# Altium PCB 核心板.pcbdoc (part 1 of 2)
Units mil, origin at the board's own origin, x right, y up, seen from the top; angles counter-clockwise.
Board outline 5980 x 3735 mil, 2 copper layers (Top Layer, Bottom Layer); 54 components, 185 nets, 550 pads, 371 vias.
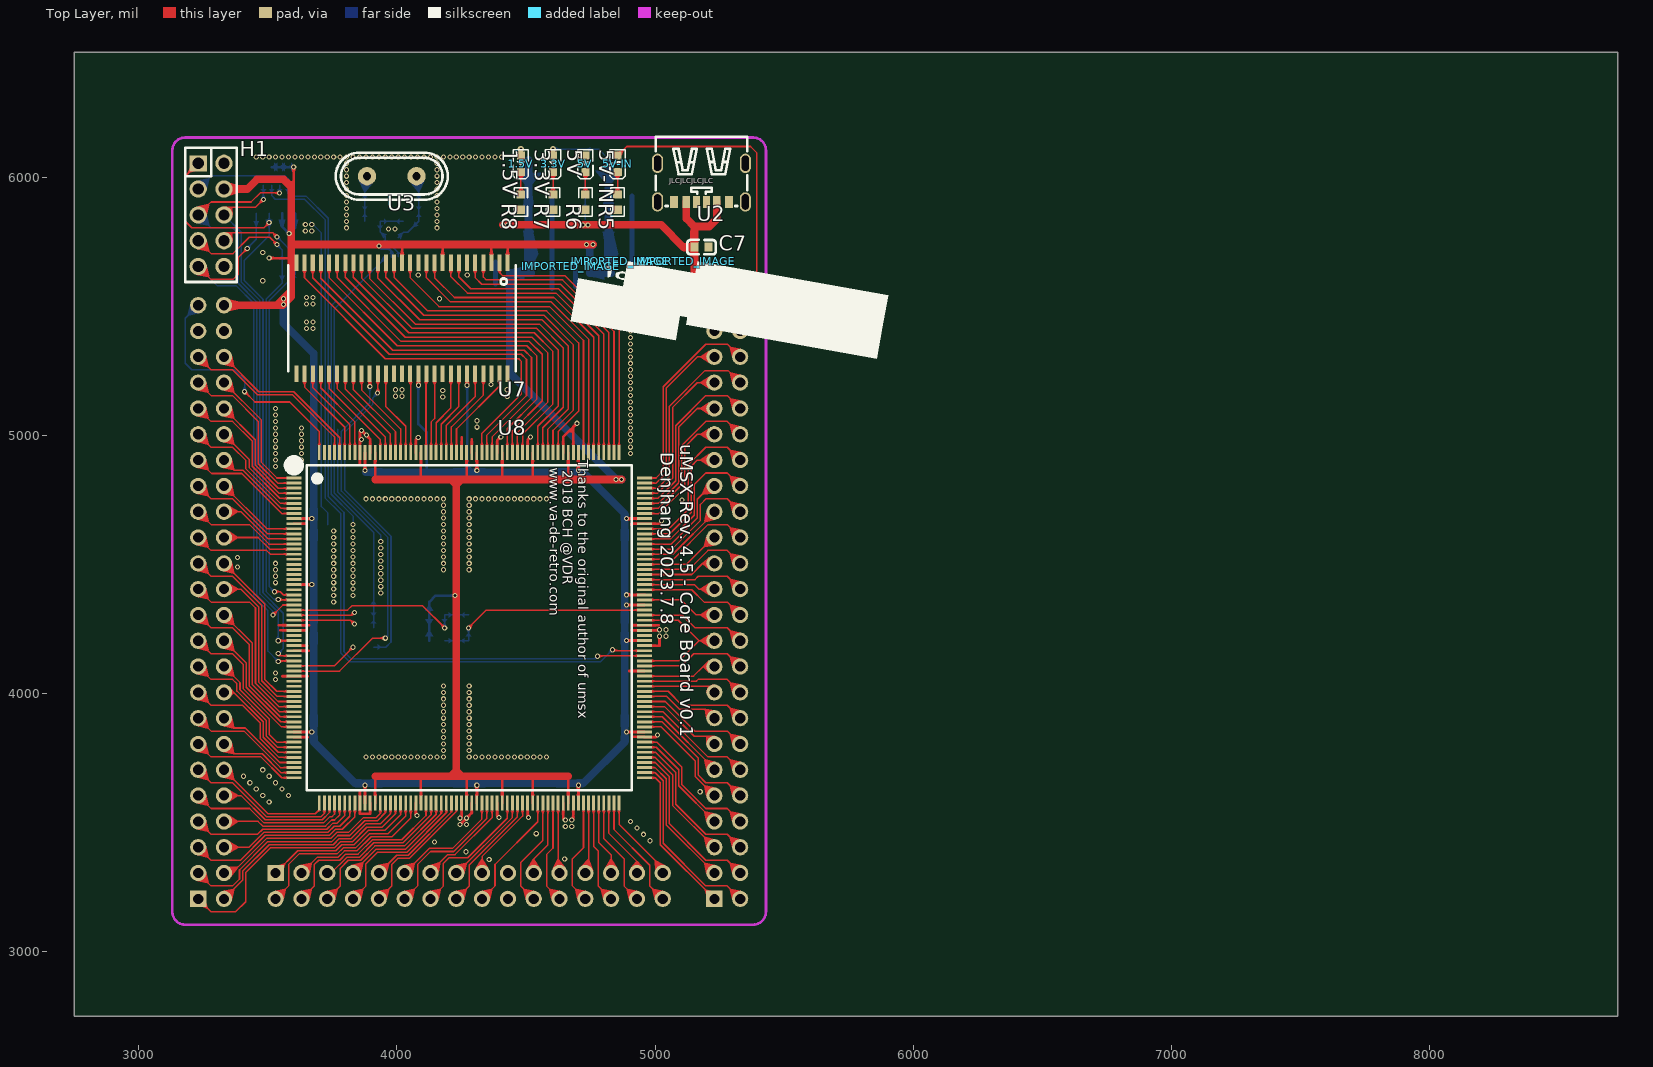
[diagram p0: Top Layer view]
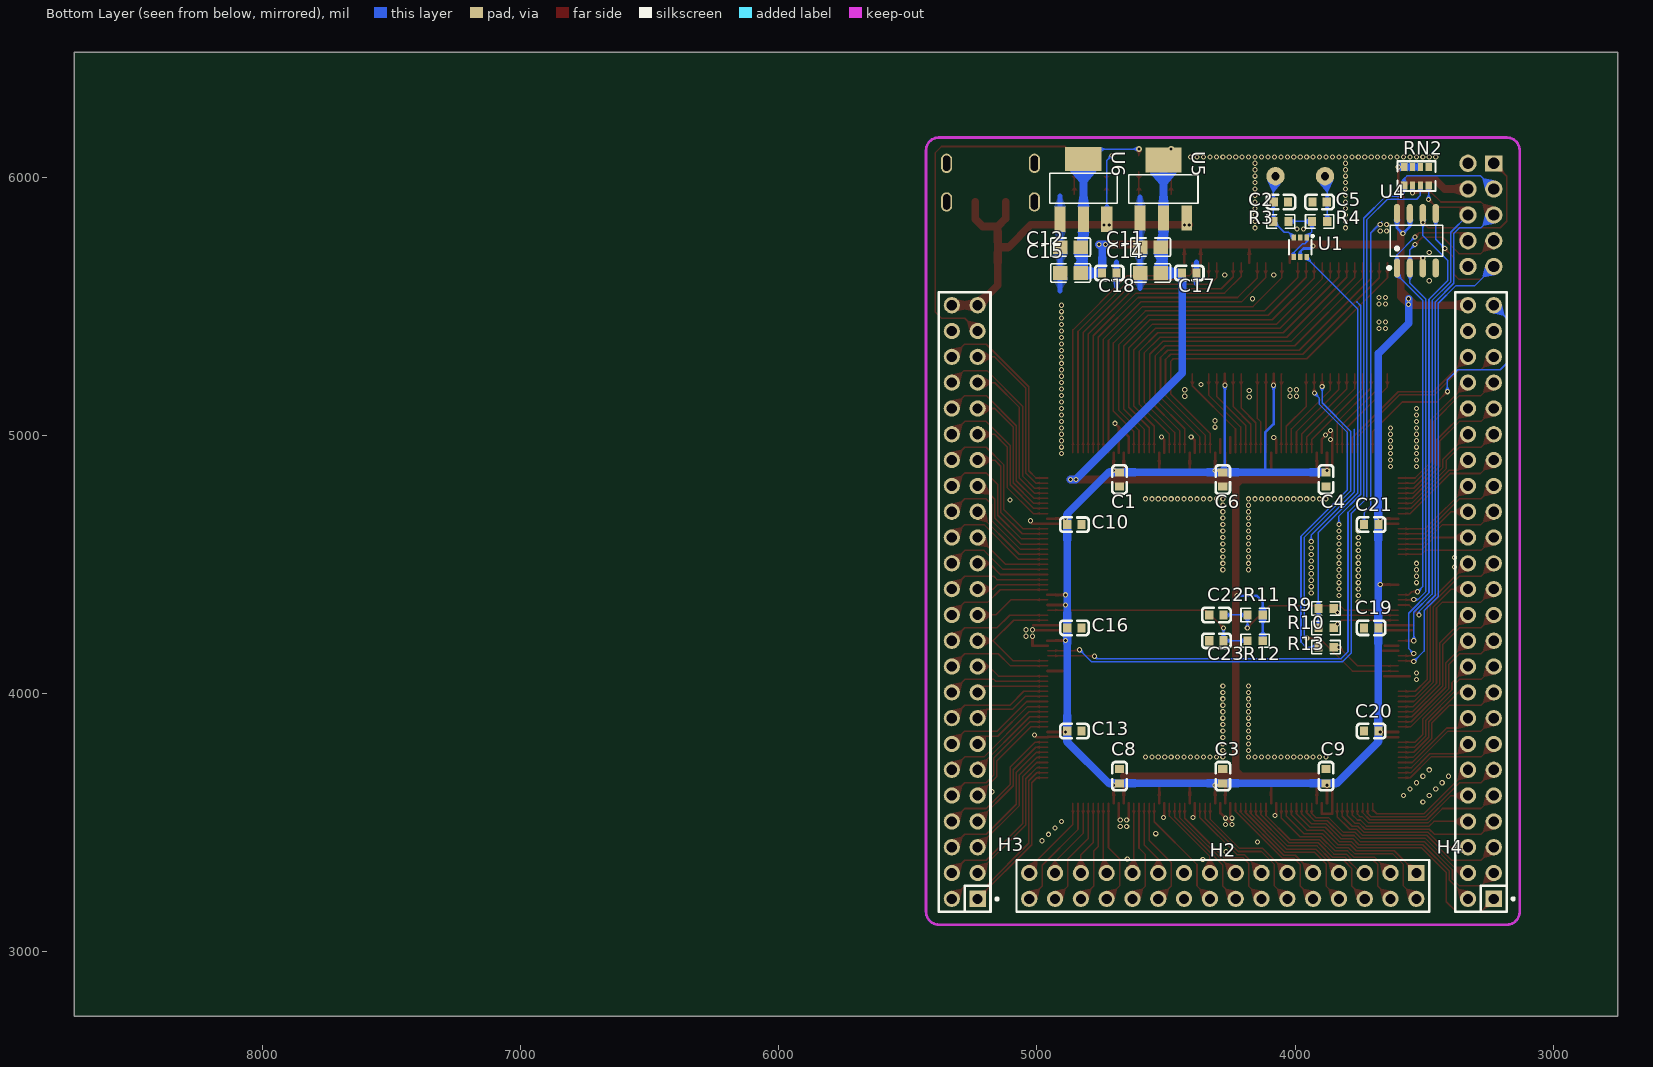
[diagram p1: Bottom Layer view, seen from below]

## Layer stack, top to bottom
Top Layer: signal copper (thickness not stored)
Dielectric: dielectric 12.6, FR-4, Dk 4.8
Bottom Layer: signal copper (thickness not stored)

## Board outline
8730,2750 2750,2750 2750,6485 8730,6485

## Components (designator, comment, footprint, x,y, rotation, side; value= is the part's Value field where it differs from the comment)
1.5V "LED_0603-R" LED_0603 4480,6055 r90 top
3.3V "LED_0603-R" LED_0603 4605,6055 r90 top
5V "LED_0603-R" LED_0603 4730,6055 r90 top
5V-IN "LED_0603-R" LED_0603 4855,6055 r90 top
C1 "CC0603KRX7R9BB104" C0603 4680,4830 r90 bottom
C2 "CC0603JRNPO9BN270" C0603 4055,5905 r0 bottom
C3 "CC0603KRX7R9BB104" C0603 4280,3680 r270 bottom
C4 "CC0603KRX7R9BB104" C0603 3880,4830 r90 bottom
C5 "CC0603JRNPO9BN270" C0603 3905,5905 r180 bottom
C6 "CC0603KRX7R9BB104" C0603 4280,4830 r90 bottom
C7 "0603B104K500NT" C0603 5180,5730 r180 top
C8 "CC0603KRX7R9BB104" C0603 4680,3680 r270 bottom
C9 "CC0603KRX7R9BB104" C0603 3880,3680 r270 bottom
C10 "CC0603KRX7R9BB104" C0603 4855,4655 r0 bottom
C11 "CL21A476MQYNNNE" C0805 4560,5730 r180 bottom
C12 "CL21A476MQYNNNE" C0805 4870,5730 r180 bottom
C13 "CC0603KRX7R9BB104" C0603 4855,3855 r0 bottom
C14 "CL21A476MQYNNNE" C0805 4560,5630 r180 bottom
C15 "CL21A476MQYNNNE" C0805 4870,5630 r180 bottom
C16 "CC0603KRX7R9BB104" C0603 4855,4255 r0 bottom
C17 "0603B104K500NT" C0603 4410,5630 r0 bottom
C18 "0603B104K500NT" C0603 4720,5630 r0 bottom
C19 "CC0603KRX7R9BB104" C0603 3705,4255 r180 bottom
C20 "CC0603KRX7R9BB104" C0603 3705,3855 r180 bottom
C21 "CC0603KRX7R9BB104" C0603 3705,4655 r180 bottom
C22 "0.1UF" C0603 4305,4305 r0 bottom
C23 "0.1UF" C0603 4305,4205 r0 bottom
H1 "排母2.54mm2*5p 直" HDR-TH_10P-P2.54-V-F-R2-C5-S2.54 3280,5855 r270 top
H2 "B-2100S32P-B110" HDR-TH_32P-P2.54-V-M-R2-C16-S2.54 4280,3255 r0 bottom
H3 "X6521WV-2x24H-C60D30" HDR-TH_48P-2.54-V-M-R2-C24-S2.54 5280,4355 r90 bottom
H4 "X6521WV-2x24H-C60D30" HDR-TH_48P-2.54-V-M-R2-C24-S2.54 3280,4355 r90 bottom
IMPORTED_IMAGE "IMPORTED_IMAGE" IMPORTED_IMAGE 4673.41,5655.66 r0 top
IMPORTED_IMAGE "IMPORTED_IMAGE" IMPORTED_IMAGE 4864.63,5675 r0 top
IMPORTED_IMAGE "IMPORTED_IMAGE" IMPORTED_IMAGE 5120.99,5675 r0 top
R3 "0603WAF1004T5E" R0603 4055,5830 r180 bottom
R4 "0603WAF1000T5E" R0603 3905,5830 r0 bottom
R5 "0603WAF3301T5E" R0603_NEW 4855,5905 r270 top
R6 "0603WAF3301T5E" R0603_NEW 4730,5905 r270 top
R7 "0603WAF3301T5E" R0603_NEW 4605,5905 r270 top
R8 "0603WAF3301T5E" R0603_NEW 4480,5905 r270 top
R9 "0603WAF1000T5E" R0603 3880,4330 r180 bottom
R10 "0603WAF1000T5E" R0603 3880,4255 r180 bottom
R11 "0603WAF1000T5E" R0603 4155,4305 r180 bottom
R12 "0603WAF1000T5E" R0603 4155,4205 r180 bottom
R13 "Res_0603" R0603 3880,4180 r0 bottom
RN2 "4D03WGJ0101T5E" RES-ARRAY-SMD_0603-8P-L3.2-W1.6-BL 3530,6005 r180 bottom
U1 "NC7WZU04P6X" SC-70-6_L2.2-W1.3-P0.65-LS2.1-BR 3980,5730 r90 bottom
U2 "USB-TYPE-C-009" TYPE-C-SMD_TYPE-C-6P 5180,5980 r180 top
U3 "ECS-214.7-S-4" HC-49US_L11.0-W4.6-P4.88 3980,6005 r180 top
U4 "EPCS4-SO8" SOP-8_L4.9-W3.9-P1.27-LS6.0-BL 3530,5755 r180 bottom
U5 "AMS1117-1.5_C963403" SOT-223_L6.3-W3.5-P2.30-LS7.0-BR 4510,5955 r270 bottom
U6 "AMS1117-3.3_C6186" SOT-223-3_L6.5-W3.4-P2.30-LS7.0-BR 4820,5955 r270 bottom
U7 "MT48LC16M" TSOP54 4020,5455 r180 top
U8 "EP1C12Q240C8N" MQFP-240_L32.0-W32.0-P0.50-LS34.6-BL 4280,4255 r270 top

## Footprints (in the part's own frame and the unit in brackets; to place one, negate y for a bottom-side part, rotate by r counter-clockwise, add the part's x,y. Pads: shape width x height; smd on the part's side, far side on the other; paste and mask are expansions set on the pad)
C0603 [mm]
  rect 0.8x0.9 smd: 1(-0.7,0) 2(0.7,0)
  silkscreen extent -1.41,-0.71 1.39,0.72
C0805 [mm]
  rect 1.41x1.35 smd: 1(-1,0) 2(1,0)
  silkscreen extent -1.96,-0.9 1.96,0.9
HC-49US_L11.0-W4.6-P4.88 [mm]
  round 1.8 hole 0.8: 1(-2.44,0) 2(2.44,0)
  silkscreen extent -5.51,-2.32 5.51,2.32
HDR-TH_10P-P2.54-V-F-R2-C5-S2.54 [mm]
  rect 1.575x1.7 hole 1.1: 1(-5.08,-1.27)
  round 1.7 hole 1.1: 2(-5.08,1.27) 3(-2.54,-1.27) 4(-2.54,1.27) 5(0,-1.27) 6(0,1.27) 7(2.54,-1.27) 8(2.54,1.27) 9(5.08,-1.27) 10(5.08,1.27)
  silkscreen extent -6.6,-2.54 6.6,2.54
HDR-TH_32P-P2.54-V-M-R2-C16-S2.54 [mm]
  rect 1.6x1.6 hole 1: 1(-19.05,-1.27)
  round 1.6 hole 1: 2(-19.05,1.27) 3(-16.51,-1.27) 4(-16.51,1.27) 5(-13.97,-1.27) 6(-13.97,1.27) 7(-11.43,-1.27) 8(-11.43,1.27) 9(-8.89,-1.27) 10(-8.89,1.27) 11(-6.35,-1.27) 12(-6.35,1.27) 13(-3.81,-1.27) 14(-3.81,1.27) 15(-1.27,-1.27) 16(-1.27,1.27) 17(1.27,-1.27) 18(1.27,1.27) 19(3.81,-1.27) 20(3.81,1.27) 21(6.35,-1.27) 22(6.35,1.27) 23(8.89,-1.27) 24(8.89,1.27) 25(11.43,-1.27) 26(11.43,1.27) 27(13.97,-1.27) 28(13.97,1.27) 29(16.51,-1.27) 30(16.51,1.27) 31(19.05,-1.27) 32(19.05,1.27)
  silkscreen extent -20.32,-2.54 20.32,2.54
HDR-TH_48P-2.54-V-M-R2-C24-S2.54 [mm]
  rect 1.6x1.6 hole 1: 1(-29.21,-1.27)
  round 1.6 hole 1: 2(-29.21,1.27) 3(-26.67,-1.27) 4(-26.67,1.27) 5(-24.13,-1.27) 6(-24.13,1.27) 7(-21.59,-1.27) 8(-21.59,1.27) 9(-19.05,-1.27) 10(-19.05,1.27) 11(-16.51,-1.27) 12(-16.51,1.27) 13(-13.97,-1.27) 14(-13.97,1.27) 15(-11.43,-1.27) 16(-11.43,1.27) 17(-8.89,-1.27) 18(-8.89,1.27) 19(-6.35,-1.27) 20(-6.35,1.27) 21(-3.81,-1.27) 22(-3.81,1.27) 23(-1.27,-1.27) 24(-1.27,1.27) 25(1.27,-1.27) 26(1.27,1.27) 27(3.81,-1.27) 28(3.81,1.27) 29(6.35,-1.27) 30(6.35,1.27) 31(8.89,-1.27) 32(8.89,1.27) 33(11.43,-1.27) 34(11.43,1.27) 35(13.97,-1.27) 36(13.97,1.27) 37(16.51,-1.27) 38(16.51,1.27) 39(19.05,-1.27) 40(19.05,1.27) 41(21.59,-1.27) 42(21.59,1.27) 43(24.13,-1.27) 44(24.13,1.27) 45(26.67,-1.27) 46(26.67,1.27) 47(29.21,-1.27) 48(29.21,1.27)
  silkscreen extent -30.48,-3.3 30.48,2.54
IMPORTED_IMAGE [mil]
  silkscreen extent 0,-286 435,0
LED_0603 [mil]
  rect 31.5x31.5 smd: 1(-33.5,-0.4) 2(29.5,-0.2)
  silkscreen extent -61,-30 53,30
MQFP-240_L32.0-W32.0-P0.50-LS34.6-BL [mm]
  rect 0.28x1.5 smd: 1(-14.75,-17.25) 2(-14.25,-17.25) 3(-13.75,-17.25) 4(-13.25,-17.25) 5(-12.75,-17.25) 6(-12.25,-17.25) 7(-11.75,-17.25) 8(-11.25,-17.25) 9(-10.75,-17.25) 10(-10.25,-17.25) 11(-9.75,-17.25) 12(-9.25,-17.25) 13(-8.75,-17.25) 14(-8.25,-17.25) 15(-7.75,-17.25) 16(-7.25,-17.25) 17(-6.75,-17.25) 18(-6.25,-17.25) 19(-5.75,-17.25) 20(-5.25,-17.25) 21(-4.75,-17.25) 22(-4.25,-17.25) 23(-3.75,-17.25) 24(-3.25,-17.25) 25(-2.75,-17.25) 26(-2.25,-17.25) 27(-1.75,-17.25) 28(-1.25,-17.25) 29(-0.75,-17.25) 30(-0.25,-17.25) 31(0.25,-17.25) 32(0.75,-17.25) 33(1.25,-17.25) 34(1.75,-17.25) 35(2.25,-17.25) 36(2.75,-17.25) 37(3.25,-17.25) 38(3.75,-17.25) 39(4.25,-17.25) 40(4.75,-17.25) 41(5.25,-17.25) 42(5.75,-17.25) 43(6.25,-17.25) 44(6.75,-17.25) 45(7.25,-17.25) 46(7.75,-17.25) 47(8.25,-17.25) 48(8.75,-17.25) 49(9.25,-17.25) 50(9.75,-17.25) 51(10.25,-17.25) 52(10.75,-17.25) 53(11.25,-17.25) 54(11.75,-17.25) 55(12.25,-17.25) 56(12.75,-17.25) 57(13.25,-17.25) 58(13.75,-17.25) 59(14.25,-17.25) 60(14.75,-17.25) 121(14.75,17.25) 122(14.25,17.25) 123(13.75,17.25) 124(13.25,17.25) 125(12.75,17.25) 126(12.25,17.25) 127(11.75,17.25) 128(11.25,17.25) 129(10.75,17.25) 130(10.25,17.25) 131(9.75,17.25) 132(9.25,17.25) 133(8.75,17.25) 134(8.25,17.25) 135(7.75,17.25) 136(7.25,17.25) 137(6.75,17.25) 138(6.25,17.25) 139(5.75,17.25) 140(5.25,17.25) 141(4.75,17.25) 142(4.25,17.25) 143(3.75,17.25) 144(3.25,17.25) 145(2.75,17.25) 146(2.25,17.25) 147(1.75,17.25) 148(1.25,17.25) 149(0.75,17.25) 150(0.25,17.25) 151(-0.25,17.25) 152(-0.75,17.25) 153(-1.25,17.25) 154(-1.75,17.25) 155(-2.25,17.25) 156(-2.75,17.25) 157(-3.25,17.25) 158(-3.75,17.25) 159(-4.25,17.25) 160(-4.75,17.25) 161(-5.25,17.25) 162(-5.75,17.25) 163(-6.25,17.25) 164(-6.75,17.25) 165(-7.25,17.25) 166(-7.75,17.25) 167(-8.25,17.25) 168(-8.75,17.25) 169(-9.25,17.25) 170(-9.75,17.25) 171(-10.25,17.25) 172(-10.75,17.25) 173(-11.25,17.25) 174(-11.75,17.25) 175(-12.25,17.25) 176(-12.75,17.25) 177(-13.25,17.25) 178(-13.75,17.25) 179(-14.25,17.25) 180(-14.75,17.25)
  rect 1.5x0.28 smd: 61(17.25,-14.75) 62(17.25,-14.25) 63(17.25,-13.75) 64(17.25,-13.25) 65(17.25,-12.75) 66(17.25,-12.25) 67(17.25,-11.75) 68(17.25,-11.25) 69(17.25,-10.75) 70(17.25,-10.25) 71(17.25,-9.75) 72(17.25,-9.25) 73(17.25,-8.75) 74(17.25,-8.25) 75(17.25,-7.75) 76(17.25,-7.25) 77(17.25,-6.75) 78(17.25,-6.25) 79(17.25,-5.75) 80(17.25,-5.25) 81(17.25,-4.75) 82(17.25,-4.25) 83(17.25,-3.75) 84(17.25,-3.25) 85(17.25,-2.75) 86(17.25,-2.25) 87(17.25,-1.75) 88(17.25,-1.25) 89(17.25,-0.75) 90(17.25,-0.25) 91(17.25,0.25) 92(17.25,0.75) 93(17.25,1.25) 94(17.25,1.75) 95(17.25,2.25) 96(17.25,2.75) 97(17.25,3.25) 98(17.25,3.75) 99(17.25,4.25) 100(17.25,4.75) 101(17.25,5.25) 102(17.25,5.75) 103(17.25,6.25) 104(17.25,6.75) 105(17.25,7.25) 106(17.25,7.75) 107(17.25,8.25) 108(17.25,8.75) 109(17.25,9.25) 110(17.25,9.75) 111(17.25,10.25) 112(17.25,10.75) 113(17.25,11.25) 114(17.25,11.75) 115(17.25,12.25) 116(17.25,12.75) 117(17.25,13.25) 118(17.25,13.75) 119(17.25,14.25) 120(17.25,14.75) 181(-17.25,14.75) 182(-17.25,14.25) 183(-17.25,13.75) 184(-17.25,13.25) 185(-17.25,12.75) 186(-17.25,12.25) 187(-17.25,11.75) 188(-17.25,11.25) 189(-17.25,10.75) 190(-17.25,10.25) 191(-17.25,9.75) 192(-17.25,9.25) 193(-17.25,8.75) 194(-17.25,8.25) 195(-17.25,7.75) 196(-17.25,7.25) 197(-17.25,6.75) 198(-17.25,6.25) 199(-17.25,5.75) 200(-17.25,5.25) 201(-17.25,4.75) 202(-17.25,4.25) 203(-17.25,3.75) 204(-17.25,3.25) 205(-17.25,2.75) 206(-17.25,2.25) 207(-17.25,1.75) 208(-17.25,1.25) 209(-17.25,0.75) 210(-17.25,0.25) 211(-17.25,-0.25) 212(-17.25,-0.75) 213(-17.25,-1.25) 214(-17.25,-1.75) 215(-17.25,-2.25) 216(-17.25,-2.75) 217(-17.25,-3.25) 218(-17.25,-3.75) 219(-17.25,-4.25) 220(-17.25,-4.75) 221(-17.25,-5.25) 222(-17.25,-5.75) 223(-17.25,-6.25) 224(-17.25,-6.75) 225(-17.25,-7.25) 226(-17.25,-7.75) 227(-17.25,-8.25) 228(-17.25,-8.75) 229(-17.25,-9.25) 230(-17.25,-9.75) 231(-17.25,-10.25) 232(-17.25,-10.75) 233(-17.25,-11.25) 234(-17.25,-11.75) 235(-17.25,-12.25) 236(-17.25,-12.75) 237(-17.25,-13.25) 238(-17.25,-13.75) 239(-17.25,-14.25) 240(-17.25,-14.75)
  silkscreen extent -16.5,-17.75 16,16
R0603 [mil]
  rect 31.75x34.02 smd: 1(-29.66,0) 2(29.66,0)
  silkscreen extent -55,-26 55,26
R0603_NEW [mil]
  rect 31.75x34.02 smd: 1(-29.66,0) 2(29.66,0)
  silkscreen extent -55,-26 55,26
RES-ARRAY-SMD_0603-8P-L3.2-W1.6-BL [mm]
  rect 0.65x0.8 smd: 1(-1.2,-0.9) 4(1.2,-0.9) 5(1.2,0.9) 8(-1.2,0.9)
  rect 0.5x0.8 smd: 2(-0.4,-0.9) 3(0.4,-0.9) 6(0.4,0.9) 7(-0.4,0.9)
  silkscreen extent -1.87,-1.45 1.87,1.47
SC-70-6_L2.2-W1.3-P0.65-LS2.1-BR [mm]
  rect 0.6x0.42 smd: 1(0.95,-0.65) 2(0.95,0) 3(0.95,0.65) 4(-0.95,0.65) 5(-0.95,0) 6(-0.95,-0.65)
  silkscreen extent -0.7,-1.34 1.22,1.1
SOP-8_L4.9-W3.9-P1.27-LS6.0-BL [mm]
  oval 0.63x1.865 smd: 1(-1.905,-2.682) 2(-0.635,-2.682) 3(0.635,-2.682) 4(1.905,-2.682) 5(1.905,2.682) 6(0.635,2.682) 7(-0.635,2.682) 8(-1.905,2.682)
  silkscreen extent -2.82,-2.83 2.58,1.52
SOT-223-3_L6.5-W3.4-P2.30-LS7.0-BR [mm]
  rect 2.5x1.1 smd: 1(2.97,-2.3) 2(2.97,0) 3(2.97,2.3)
  rect 2.34x3.6 smd: 4(-2.97,0)
  silkscreen extent -1.57,-3.33 1.37,3.33
SOT-223_L6.3-W3.5-P2.30-LS7.0-BR [mm]
  rect 2.465x1.05 smd: 1(2.857,-2.3) 2(2.857,0) 3(2.858,2.3)
  rect 2.465x3.54 smd: 4(-2.857,0)
  silkscreen extent -1.4,-3.4 1.4,3.4
TSOP54 [mil]
  rect 15.7x63 smd: 1(-409,-215) 2(-378,-215) 3(-346.05,-215) 4(-314.97,-215) 5(-283,-215) 6(-252,-215) 7(-219.97,-215) 8(-189,-215) 9(-157,-215) 10(-126.05,-215) 11(-94,-215) 12(-63,-215) 13(-31.05,-215) 14(0.03,-215) 15(31,-215) 16(63,-215) 17(93.95,-215) 18(126,-215) 19(157,-215) 20(188.95,-215) 21(220.03,-215) 22(252,-215) 23(283.05,-215) 24(315.03,-215) 25(346.05,-215) 26(378.05,-215) 27(409,-215) 28(408.95,215) 29(378,215) 30(346,215) 31(315.03,215) 32(283,215) 33(252,215) 34(220.03,215) 35(188.95,215) 36(157,215) 37(126,215) 38(93.95,215) 39(63,215) 40(31,215) 41(0.03,215) 42(-31.05,215) 43(-63,215) 44(-94,215) 45(-126.05,215) 46(-157,215) 47(-189,215) 48(-219.97,215) 49(-252,215) 50(-283,215) 51(-314.97,215) 52(-346.05,215) 53(-378,215) 54(-409,215)
  silkscreen extent -441,-205 441,205
TYPE-C-SMD_TYPE-C-6P [mm]
  oval 1.1x1.9 hole 0.7 slot 1.5 at 90 deg: 7(-4.32,-1.9) 7(-4.32,1.9) 7(4.32,-1.9) 7(4.32,1.9)
  rect 0.7x1.2 smd: A5(-0.5,1.9) A9(1.5,1.9) B5(0.5,1.9) B9(-1.5,1.9)
  rect 0.8x1.2 smd: A12(2.7,1.9) B12(-2.7,1.9)
  silkscreen extent -4.5,-4.5 4.5,2.3

## Via types
v1: diameter 20, hole 12, Top Layer to Bottom Layer, 369 vias
v2: diameter 24, hole 12, Top Layer to Bottom Layer, 2 vias

## Nets (pads, with @x,y where several pads share a name; then routed paths per layer and width w, separated by ;. In a path a pad name is that pad's centre, name@x,y a point inside that pad or via, vN(x,y) a via of type N, cw(c..) or ccw(c..) an arc to the next point about the centre after c; other vN are vias at no path point)
5V-IN: 5V-IN.2 H3.45 | length 1375.9
  Top Layer w6: 5V-IN.2@4855.2,6084.5 4890.7,6120 5370,6120 5395,6095 5395,5480 5370,5455 5280,5455 H3.45@5230,5405
$1N379: C23.1 R12.1 U8.154 | length 852.9
  Top Layer w6: v1(4277.5,4255) 4346.4,4323.9 U8.154@4959.14,4323.9
  Bottom Layer w6: R12.1@4184.66,4205 C23.1@4277.45,4205 ; C23.1@4277.5,4205.05 v1(4277.5,4255)
$1N734: R9.1 R10.1 U1.6 | length 1582.2
  Bottom Layer w6: R10.1@3909.66,4255 R9.1@3909.66,4330 3909.66,4625.34 3757.5,4777.5 3757.5,5490.69 3954.41,5687.6 U1.6@3954.41,5692.6
$1N2047: C2.2 R3.1 U1.3 U3.1 | length 283.6
  Bottom Layer w6: U1.3@4005.59,5767.4 4025.59,5787.4 4042.06,5787.4 R3.1@4084.66,5830 4084.66,5996.4 U3.1@4076.06,6005
$1N12195: C22.1 R11.1 U8.27 | length 768.9
  Top Layer w6: U8.27@3600.86,4323.9 3808.9,4323.9 3825,4340 4100,4340 v1(4185,4255)
  Bottom Layer w6: v1(4185,4255) 4185,4304.66 R11.1@4184.66,4305 C22.1@4277.45,4305
$1N16804: R3.2 R4.2 U1.1 U1.4 | length 263.1
  Bottom Layer w6: U1.4@4005.59,5692.6 4005.59,5709.41 3972.5,5742.5 3962.91,5742.5 3954.41,5751 U1.1@3954.41,5767.4 3954.41,5770.25 3934.66,5790 R4.2@3934.66,5830 R3.2@4025.34,5830
$1N16805: C5.2 R4.1 U3.2 | length 178.6
  Bottom Layer w6: R4.1@3875.34,5830 3875.34,5996.4 U3.2@3883.94,6005
$1N39791: 5V-IN.1 R5.1 | length 87
  Top Layer w6: R5.1@4855,5934.66 4855.4,5935.06 5V-IN.1@4855.4,6021.5
$1N39793: 5V.1 R6.1 | length 87
  Top Layer w6: R6.1@4730,5934.66 4730.4,5935.06 5V.1@4730.4,6021.5
$1N39797: 3.3V.1 R7.1 | length 87
  Top Layer w6: R7.1@4605,5934.66 4605.4,5935.06 3.3V.1@4605.4,6021.5
$1N39803: 1.5V.1 R8.1 | length 87
  Top Layer w6: R8.1@4480,5934.66 4480.4,5935.06 1.5V.1@4480.4,6021.5
$1N46954: R13.1 U8.38 | length 259.2
  Top Layer w6: U8.38@3600.86,4107.36 3757.36,4107.36 v1(3830,4180)
AS_CK: H1.1 U4.6 U8.36 | length 2462.8
  Top Layer w6: H1.1@3230,6055 3180,6005 3180,5830 3205,5805 3485,5805 v1@3500,5820 ; v1(3540,4155) 3548.27,4146.73 U8.36@3600.86,4146.73
  Bottom Layer w6: U4.6@3505,5860.61 v1(3505,5825) 3505,5775 3409,5679 3409,5599.94 3481,5527.94 3481,4390.97 3560,4311.97 3560,4175 v1(3540,4155)
AS_CS: H1.8 U4.1 U8.24 | length 1758.2
  Top Layer w6: H1.8@3330,5755 3360,5785 3520,5785 v1(3535,5770) ; v1(3525,4395) 3547.95,4395 3560,4382.95 U8.24@3600.86,4382.95
  Bottom Layer w6: v1(3525,4395) 3505,4415 3505,5523.03 3605,5623.03 U4.1@3605,5649.39 3605,5700 v1(3535,5770)
AS_DI: H1.7 U4.2 U8.25 | length 1862.8
  Top Layer w6: H1.7@3230,5755 3280,5705 3365,5705 3428,5768 3507,5768 v1(3535,5740) ; v1(3540,4365) 3541.73,4363.27 U8.25@3600.86,4363.27
  Bottom Layer w6: v1(3535,5740) 3555,5720 U4.2@3555,5649.39 3555,5590 3493,5528 3493,4395.94 3523.94,4365 v1(3540,4365)
AS_DO: H1.9 U4.5 U8.37 | length 2211.5
  Top Layer w6: H1.9@3230,5655 3280,5605 3365,5605 3385,5625 3385,5690 v1(3420,5725) ; v1(3540,4125) 3542.05,4127.05 U8.37@3600.86,4127.05
  Bottom Layer w6: H1.9@3230,5655 3305,5580 3378.03,5580 3445,5513.03 3445,4376.06 3500,4321.06 3500,4165 v1(3540,4125) ; v1(3420,5725) 3420,5725.61 3455,5760.61 U4.5@3455,5860.61
C_CE: H1.6 RN2.4 U8.33 | length 2030.2
  Top Layer w6: H1.6@3330,5855 3360,5885 3452.5,5885 v1(3482.5,5915) ; v1(3540,4205) 3600.07,4205 U8.33@3600.86,4205.79
  Bottom Layer w6: H1.6@3330,5855 3397,5788 3397,5594.97 3469,5522.97 3469,4386 3540,4315 v1(3540,4205) ; v1(3482.5,5915) 3482.5,5969.31 RN2.4@3482.76,5969.56
C_CONF: H1.5 RN2.2 U8.26 | length 2195.7
  Top Layer w6: H1.5@3230,5855 3280,5905 3435,5905 3470,5940 v1(3545,5940) ; v1(3520,4305) 3558.58,4343.58 U8.26@3600.86,4343.58
  Bottom Layer w6: H1.5@3230,5855 3280,5805 3363.03,5805 3385,5783.03 3385,5590 3457,5518 3457,4381.03 3520,4318.03 v1(3520,4305) ; v1(3545,5940) 3545.75,5940.75 RN2.2@3545.75,5969.56
C_DONE: H1.3 RN2.1 U8.145 | length 3510.8
  Top Layer w6: v1(4777.5,4145) 4779.23,4146.73 U8.145@4959.14,4146.73
  Bottom Layer w6: H1.3@3230,5955 3281,6006 3566.55,6006 3577.24,5995.31 RN2.1@3577.24,5969.56 3577.24,5939.56 3588.8,5928 3647.29,5928 3733.5,5841.79 3733.5,4763.47 3795,4701.97 3795,4161.97 3821.97,4135 4767.5,4135 v1(4777.5,4145)
C_STAT: RN2.3 U8.146 | length 3201.4
  Top Layer w6: v1(4835,4170) 4838.58,4166.42 U8.146@4959.14,4166.42
  Bottom Layer w6: RN2.3@3514.25,5969.56 3514.25,5930.75 3529,5916 3642.32,5916 3721.5,5836.82 3721.5,4758.5 3783,4697 3783,4157 3817,4123 4788,4123 v1(4835,4170)
CLK21M: R9.2 U8.28 | length 238.6
  Top Layer w6: U8.28@3600.86,4304.21 3824.21,4304.21 v1(3835,4315)
EXTCLK: R10.2 U8.29 | length 240.2
  Top Layer w6: U8.29@3600.86,4284.53 3820.47,4284.53 v1(3835,4270)
GND: C1.1 C2.1 C3.1 C4.1 C5.1 C6.1 C7.1 C8.1 C9.1 C10.1 C11.1 C12.1 C13.1 C14.1 C15.1 C16.1 C17.1 C18.1 C19.1 C20.1 C21.1 C22.2 C23.2 H1.2 H1.10 H2.19 H2.20 H3.46 H4.45 H4.46 R5.2 R6.2 R7.2 R8.2 RN2.5 U1.2 U2.7 U2.A12 U2.B12 U4.4 U5.1 U6.1 U7.6 U7.12 U7.28 U7.41 U7.46 U7.52 U7.54 U8.10 U8.30 U8.31 U8.34 U8.35 U8.40 U8.52 U8.69 U8.71 U8.80 U8.89 U8.91 U8.96 U8.102 U8.109 U8.111 U8.129 U8.142 U8.147 U8.150 U8.151 U8.171 U8.190 U8.192 U8.199 U8.205 U8.210 U8.212 U8.221 U8.230 U8.232 | length 6044.8
  Top Layer w10: 3542.5,4265 3600.7,4265 U8.30@3600.86,4264.84 3660,4264.84 ; 3547.5,4245 3600.7,4245 U8.31@3600.86,4245.16 3647.5,4245.16 ; 3555,4067.5 3600.38,4067.5 U8.40@3600.86,4067.99 3654.51,4067.99 3655,4067.5 ; U8.52@3600.86,3831.77 3655,3831.77 ; U8.35@3600.86,4166.42 3657.5,4166.42 ; U8.34@3600.86,4186.1 3652.5,4186.1 ; U8.10@3600.86,4658.54 3645,4658.54 ; 3856.76,3625 U8.69@3856.76,3575.87 3856.76,3534 3896.14,3534 U8.71@3896.14,3575.87 ; 3856.78,4890 U8.232@3856.78,4934.13 3856.78,5014.27 v1(3862.5,5020) 3896.14,4986.35 U8.230@3896.14,4934.13 ; U8.80@4073.3,3575.87 4073.3,3531.7 v1(4077.5,3527.5) ; U8.221@4073.3,4934.13 4073.3,4983.31 v1(4082.5,4992.5) ; v1(4245,3492.5) v1(4270,3517.5) 4289.84,3537.34 U8.91@4289.84,3575.87 ; v1(4245,3517.5) 4250.47,3522.97 U8.89@4250.47,3575.87 ; U8.212@4250.48,4934.13 4250.48,4992.5 ; U8.210@4289.85,4934.13 4289.85,4985 ; U8.96@4388.27,3575.87 4388.27,3526.74 v1(4395,3520) ; U8.205@4388.27,4934.13 4388.27,4980.77 v1(4402.5,4995) ; U8.102@4506.38,3575.87 4506.38,3523.62 v1(4510,3520) ; U8.199@4506.38,4934.13 4506.38,4983.88 v1(4517.5,4995) ; U8.109@4644.16,3575.87 4644.16,3518.34 v1(4652.5,3510) ; U8.192@4644.16,4934.13 4644.16,4994.16 4667.22,5017.22 ; v1(4677.5,3510) 4683.53,3516.03 U8.111@4683.53,3575.87 ; U8.190@4683.53,4934.13 4683.53,5010.78 ; v1(4697.5,5047.5) 4683.53,5033.53 ; 4900,4087.68 U8.142@4959.14,4087.68 ; 4907.5,4655 4911.04,4658.54 U8.171@4959.14,4658.54 5017.5,4658.54 ; 4910,4245 4958.98,4245 U8.150@4959.14,4245.16 5015.16,4245.16 v1(5017.5,4247.5) ; 4912.5,3832.5 4958.4,3832.5 U8.129@4959.14,3831.77 5001.77,3831.77 v1(5010,3840) ; 4912.5,4265 4958.98,4265 U8.151@4959.14,4264.84 5015,4264.84 ; U8.147@4959.14,4186.1 5017.5,4186.1 v1(5017.5,4222.5) ; 4667.22,5017.22 4677.1,5017.22 4683.53,5010.78 ; 4667.22,5017.22 4683.53,5033.53 ; 4683.53,5010.78 4683.53,5033.53
  Bottom Layer w6: 3665,5827.5 3707.5,5785 3707.5,4725 3732.56,4699.94 C21.1@3732.55,4655 ; 3760,5517.5 3745.5,5503 3745.5,4772.53 3830,4688.03 v1(3830,4655) ; 3771.5,5024 3771.5,4780.47 3937.5,4614.47 v1@3937.5,4585
  Bottom Layer w20: 4382.44,5587.5 C17.1@4382.45,5630 4382.44,5672.5 ; 4600.55,5570 U5.1@4600.55,5842.5 4600.55,5925 ; 4692.5,5577.5 4692.5,5630 4692.5,5672.5 ; 4910.55,5560 U6.1@4910.55,5838.07 4910.55,5927.5
  other v1: 4357.5,3357.5 4650,3360 4267.5,3387.5 4145,3425 4980,3430 4955,3455 4540,3457.5 4930,3480 4652.5,3485 4677.5,3485 4270,3492.5 4905,3505 3505,3580 3480,3605 3580,3605 5175,3620 3455,3630 3555,3630 3430,3655 3530,3655 3405,3680 3505,3680 3480,3705 3880,3755 3905,3755 3930,3755 3955,3755 3980,3755 4005,3755 4030,3755 4055,3755 4080,3755 4105,3755 4130,3755 4155,3755 4180,3755 4280,3755 4305,3755 4330,3755 4355,3755 4380,3755 4405,3755 4430,3755 4455,3755 4480,3755 4505,3755 4530,3755 4555,3755 4580,3755 4180,3780 4280,3780 4180,3805 4280,3805 4180,3830 4280,3830 4180,3855 4280,3855 4180,3880 4280,3880 4180,3905 4280,3905 4180,3930 4280,3930 4180,3955 4280,3955 4180,3980 4280,3980 4180,4005 4280,4005 4180,4030 4280,4030 3530,4055 3530,4080 5042.5,4222.5 5042.5,4247.5 3755,4355 3755,4380 3830,4380 3937.5,4389.47 3755,4405 3830,4405 3937.5,4414.47 3530,4430 3755,4430 3830,4430 3937.5,4439.47 3530,4455 3755,4455 3830,4455 3937.5,4464.47 3530,4480 3755,4480 3830,4480 4180,4480 4280,4480 3937.5,4489.47 3382.5,4490.25 3530,4505 3755,4505 3830,4505 4180,4505 4280,4505 3937.5,4514.47 3382.5,4527.5 3755,4530 3830,4530 4180,4530 4280,4530 3937.5,4539.47 3755,4555 3830,4555 4180,4555 4280,4555 3937.5,4564.47 3755,4580 3830,4580 4180,4580 4280,4580 3937.5,4589.47 3755,4605 3830,4605 4180,4605 4280,4605 3755,4630 3830,4630 4180,4630 4280,4630 4180,4655 4280,4655 5025,4670 4180,4680 4280,4680 4180,4705 4280,4705 4180,4730 4280,4730 5105,4750 3880,4755 3905,4755 3930,4755 3955,4755 3980,4755 4005,4755 4030,4755 4055,4755 4080,4755 4105,4755 4130,4755 4155,4755 4180,4755 4280,4755 4305,4755 4330,4755 4355,4755 4380,4755 4405,4755 4430,4755 4455,4755 4480,4755 4505,4755 4530,4755 4555,4755 4580,4755 3530,4880 3630,4880 3530,4905 3630,4905 3530,4930 3630,4930 4905,4930 3530,4955 3630,4955 4905,4955 3530,4980 3630,4980 4905,4980 3862.5,4985 3882.5,5002.5 3530,5005 3630,5005 4905,5005 3530,5030 3630,5030 4905,5030 4310,5032.5 3530,5055 4905,5055 4310,5057.5 3530,5080 4905,5080 3530,5105 4905,5105 4905,5130 4177.5,5150 3995,5152.5 4020,5152.5 4427.5,5152.5 4905,5155 4177.5,5175 3995,5177.5 4020,5177.5 4427.5,5177.5 4905,5180 4365,5197.5 4905,5205 4905,5230 4905,5255 4905,5280 4905,5305 4905,5330 4905,5355 4905,5380 4905,5405 3650,5415 3675,5415 4905,5430 3650,5440 3675,5440 4905,5455 4905,5480 4905,5505 3650,5510 3675,5510 4165,5530 3650,5535 3675,5535 3480,5600 4082.5,5622.5 4272.5,5622.5 3480,5710 3645,5792.5 3670,5792.5 3967.5,5800 3992.5,5800 3805,5805 4155,5805 3645,5817.5 3670,5817.5 3805,5830 4155,5830 3805,5855 4155,5855 3805,5880 4155,5880 3805,5905 4155,5905 3805,5930 4155,5930 3805,5955 4155,5955 3805,5980 4155,5980 3805,6005 4155,6005 3805,6030 4155,6030 3805,6055 4155,6055 3455,6080 3480,6080 3505,6080 3530,6080 3555,6080 3580,6080 3605,6080 3630,6080 3655,6080 3680,6080 3705,6080 3730,6080 3755,6080 3780,6080 3805,6080 3830,6080 3855,6080 3880,6080 3905,6080 3930,6080 3955,6080 3980,6080 4005,6080 4030,6080 4055,6080 4080,6080 4105,6080 4130,6080 4155,6080 4180,6080 4205,6080 4230,6080 4255,6080 4280,6080 4305,6080 4330,6080 4355,6080 4380,6080 4405,6080
IO/1: H4.42 U8.1 | length 520
  Top Layer w6: H4.42@3330,5205 3475.07,5059.93 3475.07,4895.84 3535.2,4835.71 U8.1@3600.86,4835.71
IO/2: H4.41 U8.2 | length 628.1
  Top Layer w6: H4.41@3230,5205 3280,5155 3363.03,5155 3463.07,5054.96 3463.07,4890.87 3537.92,4816.02 U8.2@3600.86,4816.02
IO/3: H4.40 U8.3 | length 456.1
  Top Layer w6: H4.40@3330,5105 3451.07,4983.93 3451.07,4885.9 3540.63,4796.34 U8.3@3600.86,4796.34
IO/4: H4.39 U8.4 | length 564.3
  Top Layer w6: H4.39@3230,5105 3280,5055 3363.03,5055 3439.07,4978.96 3439.07,4880.93 3543.35,4776.65 U8.4@3600.86,4776.65
IO/5: H4.38 U8.5 | length 392.3
  Top Layer w6: H4.38@3330,5005 3427.07,4907.93 3427.07,4875.96 3546.06,4756.97 U8.5@3600.86,4756.97
IO/6: H4.37 U8.6 | length 500.5
  Top Layer w6: H4.37@3230,5005 3280,4955 3363.03,4955 3415.07,4902.96 3415.07,4870.99 3548.78,4737.28 U8.6@3600.86,4737.28
IO/7: H4.36 U8.7 | length 348.5
  Top Layer w6: H4.36@3330,4905 3370.02,4864.98 3404.11,4864.98 3551.49,4717.6 U8.7@3600.86,4717.6
IO/8: H4.35 U8.8 | length 456.6
  Top Layer w6: H4.35@3230,4905 3282.02,4852.98 3399.14,4852.98 3554.21,4697.91 U8.8@3600.86,4697.91
IO/11: H4.34 U8.11 | length 339.7
  Top Layer w6: H4.34@3330,4805 3496.14,4638.86 U8.11@3600.86,4638.86
IO/12: H4.33 U8.12 | length 447.8
  Top Layer w6: H4.33@3230,4805 3280,4755 3363.03,4755 3498.86,4619.17 U8.12@3600.86,4619.17
IO/13: H4.32 U8.13 | length 314.6
  Top Layer w6: H4.32@3330,4705 3396.06,4705 3501.57,4599.49 U8.13@3600.86,4599.49
IO/14: H4.31 U8.14 | length 422.7
  Top Layer w6: H4.31@3230,4705 3280,4655 3429.09,4655 3504.29,4579.8 U8.14@3600.86,4579.8
IO/15: H4.30 U8.15 | length 289.5
  Top Layer w6: H4.30@3330,4605 3462.12,4605 3507,4560.12 U8.15@3600.86,4560.12
IO/16: H4.29 U8.16 | length 397.6
  Top Layer w6: H4.29@3230,4605 3280,4555 3495.15,4555 3509.72,4540.43 U8.16@3600.86,4540.43
IO/43: H4.28 U8.43 | length 647.5
  Top Layer w6: H4.28@3330,4505 3488,4347 3488,4054.88 3533.94,4008.94 U8.43@3600.86,4008.94
IO/44: H4.27 U8.44 | length 755.6
  Top Layer w6: H4.27@3230,4505 3280,4455 3363.03,4455 3476,4342.03 3476,4049.91 3536.66,3989.25 U8.44@3600.86,3989.25
IO/45: H4.26 U8.45 | length 622.3
  Top Layer w6: H4.26@3330,4405 3396.06,4405 3464,4337.06 3464,4044.94 3539.37,3969.57 U8.45@3600.86,3969.57
IO/46: H4.25 U8.46 | length 730.5
  Top Layer w6: H4.25@3230,4405 3280,4355 3429.09,4355 3452,4332.09 3452,4039.97 3542.09,3949.88 U8.46@3600.86,3949.88
IO/47: H4.24 U8.47 | length 519.8
  Top Layer w6: H4.24@3330,4305 3440,4195 3440,4035 3544.8,3930.2 U8.47@3600.86,3930.2
IO/48: H4.23 U8.48 | length 628
  Top Layer w6: H4.23@3230,4305 3280,4255 3363.03,4255 3428,4190.03 3428,4030.03 3547.52,3910.51 U8.48@3600.86,3910.51
IO/49: H4.22 U8.49 | length 456
  Top Layer w6: H4.22@3330,4205 3416,4119 3416,4025.06 3550.23,3890.83 U8.49@3600.86,3890.83
IO/50: H4.21 U8.50 | length 564.2
  Top Layer w6: H4.21@3230,4205 3280,4155 3363.03,4155 3404,4114.03 3404,4020.09 3552.95,3871.14 U8.50@3600.86,3871.14
IO/53: H4.20 U8.53 | length 443.8
  Top Layer w6: H4.20@3330,4105 3392,4043 3392,4015.12 3506,3901.12 3506,3840.97 3534.88,3812.09 U8.53@3600.86,3812.09
IO/54: H4.19 U8.54 | length 551.9
  Top Layer w6: H4.19@3230,4105 3280,4055 3363.03,4055 3380,4038.03 3380,4010.15 3494,3896.15 3494,3836 3537.6,3792.4 U8.54@3600.86,3792.4
IO/55: H4.18 U8.55 | length 402.3
  Top Layer w6: H4.18@3330,4005 3368.18,4005 3482,3891.18 3482,3831.03 3540.31,3772.72 U8.55@3600.86,3772.72
IO/56: H4.17 U8.56 | length 510.5
  Top Layer w6: H4.17@3230,4005 3280,3955 3401.21,3955 3470,3886.21 3470,3826.06 3543.03,3753.03 U8.56@3600.86,3753.03
IO/57: H4.16 U8.57 | length 342
  Top Layer w6: H4.16@3330,3905 3368,3867 3412.09,3867 3545.74,3733.35 U8.57@3600.86,3733.35
IO/58: H4.15 U8.58 | length 450.1
  Top Layer w6: H4.15@3230,3905 3280,3855 3407.12,3855 3548.46,3713.66 U8.58@3600.86,3713.66
IO/59: H4.14 U8.59 | length 316.9
  Top Layer w6: H4.14@3330,3805 3368,3767 3478.15,3767 3551.17,3693.98 U8.59@3600.86,3693.98
IO/60: H4.13 U8.60 | length 425
  Top Layer w6: H4.13@3230,3805 3280,3755 3473.18,3755 3553.89,3674.29 U8.60@3600.86,3674.29
IO/61: H4.12 U8.61 | length 471.3
  Top Layer w6: H4.12@3330,3705 3500,3535 3683.41,3535 3699.28,3550.87 U8.61@3699.28,3575.87
IO/62: H4.11 U8.62 | length 609.4
  Top Layer w6: H4.11@3230,3705 3280,3655 3363.03,3655 3495.03,3523 3705.57,3523 3718.97,3536.4 U8.62@3718.97,3575.87
IO/63: H4.10 U8.63 | length 496
  Top Layer w6: H4.10@3330,3605 3396.06,3605 3490.06,3511 3710.54,3511 3738.66,3539.11 U8.63@3738.66,3575.87
IO/64: H4.9 U8.64 | length 629
  Top Layer w6: H4.9@3230,3605 3280,3555 3429.09,3555 3485.09,3499 3715.51,3499 3739.01,3522.5 3747.5,3522.5 3758.34,3533.34 U8.64@3758.34,3575.87
IO/65: H4.8 U8.65 | length 519.2
  Top Layer w6: H4.8@3330,3505 3462.12,3505 3480.12,3487 3723.35,3487 3746.85,3510.5 3758.53,3510.5 3778.03,3530 U8.65@3778.03,3575.87
IO/66: H4.7 U8.66 | length 666.7
  Top Layer w6: H4.7@3230,3505 3280,3455 3460,3455 3480,3475 3728.32,3475 3751.82,3498.5 3768.5,3498.5 3797.72,3527.72 U8.66@3797.72,3575.87
IO/67: H4.6 U8.67 | length 587.7
  Top Layer w6: H4.6@3330,3405 3426.97,3405 3484.97,3463 3733.29,3463 3756.79,3486.5 3778.47,3486.5 3817.39,3525.42 U8.67@3817.39,3575.87
IO/68: H4.5 U8.68 | length 750.2
  Top Layer w6: H4.5@3230,3405 3280,3355 3393.94,3355 3489.94,3451 3738.26,3451 3761.76,3474.5 3788.44,3474.5 3837.09,3523.14 U8.68@3837.09,3575.87
IO/73: H4.4 U8.73 | length 741.3
  Top Layer w6: H4.4@3330,3305 3360.91,3305 3494.91,3439 3743.24,3439 3766.74,3462.5 3812.65,3462.5 3870.15,3520 3920,3520 3935.51,3535.51 U8.73@3935.51,3575.87
IO/74: H4.3 U8.74 | length 921.5
  Top Layer w6: H4.3@3230,3305 3280,3255 3363.03,3255 3390,3281.97 3390,3317.12 3499.88,3427 3748.21,3427 3771.71,3450.5 3817.62,3450.5 3875.12,3508 3924.97,3508 3955.2,3538.22 U8.74@3955.2,3575.87
IO/75: H4.2 U8.75 | length 843.1
  Top Layer w6: H4.2@3330,3205 3402,3277 3402,3312.15 3504.85,3415 3753.18,3415 3776.68,3438.5 3822.59,3438.5 3880.09,3496 3936,3496 3974.88,3534.88 U8.75@3974.88,3575.87
IO/76: H4.1 U8.76 | length 1050.1
  Top Layer w6: H4.1@3230,3205 3280,3155 3375,3155 3414,3194 3414,3307.18 3509.82,3403 3758.15,3403 3781.65,3426.5 3827.56,3426.5 3883.06,3482 3942,3482 3994.57,3534.57 U8.76@3994.57,3575.87
IO/121: H3.1 U8.121 | length 605.8
  Top Layer w6: U8.121@4959.14,3674.29 5000.71,3674.29 5020,3655 5020,3415 H3.1@5230,3205
IO/122: H3.2 U8.122 | length 715.5
  Top Layer w6: U8.122@4959.14,3693.98 5000.64,3693.98 5032,3662.62 5032,3419.97 5196.97,3255 5280,3255 H3.2@5330,3205
IO/123: H3.3 U8.123 | length 545
  Top Layer w6: U8.123@4959.14,3713.66 5000.43,3713.66 5044,3670.09 5044,3491 H3.3@5230,3305
IO/124: H3.4 U8.124 | length 655
  Top Layer w6: U8.124@4959.14,3733.35 5000.74,3733.35 5056,3678.09 5056,3495.97 5196.97,3355 5280,3355 H3.4@5330,3305
IO/125: H3.5 U8.125 | length 484.8
  Top Layer w6: U8.125@4959.14,3753.03 5001.06,3753.03 5068,3686.09 5068,3567 H3.5@5230,3405
IO/126: H3.6 U8.126 | length 595.1
  Top Layer w6: U8.126@4959.14,3772.72 5002.03,3772.72 5080,3694.75 5080,3571.97 5196.97,3455 5280,3455 H3.6@5330,3405
IO/127: H3.7 U8.127 | length 426.4
  Top Layer w6: U8.127@4959.14,3792.4 5004.97,3792.4 5092,3705.37 5092,3643 H3.7@5230,3505
IO/128: H3.8 U8.128 | length 537.9
  Top Layer w6: U8.128@4959.14,3812.09 5007.91,3812.09 5104,3716 5104,3647.97 5196.97,3555 5280,3555 H3.8@5330,3505
IO/131: H3.9 U8.131 | length 416.3
  Top Layer w6: U8.131@4959.14,3871.14 5023.86,3871.14 5156,3739 5156,3679 H3.9@5230,3605
IO/132: H3.10 U8.132 | length 527.7
  Top Layer w6: U8.132@4959.14,3890.83 5026.8,3890.83 5168,3749.63 5168,3683.97 5196.97,3655 5280,3655 H3.10@5330,3605
IO/133: H3.11 U8.133 | length 357.8
  Top Layer w6: U8.133@4959.14,3910.51 5027.63,3910.51 5230,3708.14 H3.11@5230,3705
IO/134: H3.12 U8.134 | length 464.1
  Top Layer w6: U8.134@4959.14,3930.2 5030.56,3930.2 5205.76,3755 5280,3755 H3.12@5330,3705
IO/135: H3.13 U8.135 | length 330.9
  Top Layer w6: U8.135@4959.14,3949.88 5036.81,3949.88 5151.69,3835 5200,3835 H3.13@5230,3805
IO/136: H3.14 U8.136 | length 439
  Top Layer w6: U8.136@4959.14,3969.57 5039.75,3969.57 5154.32,3855 5280,3855 H3.14@5330,3805
IO/137: H3.15 U8.137 | length 305.8
  Top Layer w6: U8.137@4959.14,3989.25 5045.75,3989.25 5095,3940 5195,3940 H3.15@5230,3905
IO/138: H3.16 U8.138 | length 413.9
  Top Layer w6: U8.138@4959.14,4008.94 5051.06,4008.94 5105,3955 5280,3955 H3.16@5330,3905
IO/139: H3.17 U8.139 | length 280.6
  Top Layer w6: U8.139@4959.14,4028.62 5206.38,4028.62 H3.17@5230,4005
IO/140: H3.18 U8.140 | length 394.3
  Top Layer w6: U8.140@4959.14,4048.31 5160,4048.31 5166.69,4055 5280,4055 H3.18@5330,4005
IO/141: H3.19 U8.141 | length 286.2
  Top Layer w6: U8.141@4959.14,4067.99 5149.49,4067.99 5186.5,4105 H3.19@5230,4105
IO/143: H3.20 U8.143 | length 411.3
  Top Layer w6: U8.143@4959.14,4107.36 5102.36,4107.36 5150,4155 5280,4155 H3.20@5330,4105
IO/152: H3.21 U8.144 U8.152 | length 547
  Top Layer w6: U8.144@4959.14,4127.05 5092.05,4127.05 5170,4205 ; U8.152@4959.14,4284.53 5090.47,4284.53 5170,4205 ; H3.21@5230,4205 5170,4205
IO/153: H3.22 U8.153 | length 412
  Top Layer w6: U8.153@4959.14,4304.21 5105.79,4304.21 5155,4255 5280,4255 H3.22@5330,4205
IO/156: H3.23 U8.156 | length 295
  Top Layer w6: U8.156@4959.14,4363.27 5101.73,4363.27 5160,4305 H3.23@5230,4305
IO/158: H3.24 U8.158 | length 411.3
  Top Layer w6: U8.158@4959.14,4402.64 5142.36,4402.64 5190,4355 5280,4355 H3.24@5330,4305
IO/159: H3.25 U8.159 | length 278
  Top Layer w6: U8.159@4959.14,4422.32 5152.68,4422.32 5170,4405 H3.25@5230,4405
IO/160: H3.26 U8.160 | length 397
  Top Layer w6: U8.160@4959.14,4442.01 5155,4442.01 5167.99,4455 5280,4455 H3.26@5330,4405